# Altium PCB Bottom_Board.PcbDoc
Units mil, origin at the board's own origin, x right, y up, seen from the top; angles counter-clockwise.
Board outline 6000 x 4000 mil, 2 copper layers (Top Layer, Bottom Layer); 170 components, 198 nets, 729 pads, 0 vias.
Unrouted connection lines stored in the file: 469.
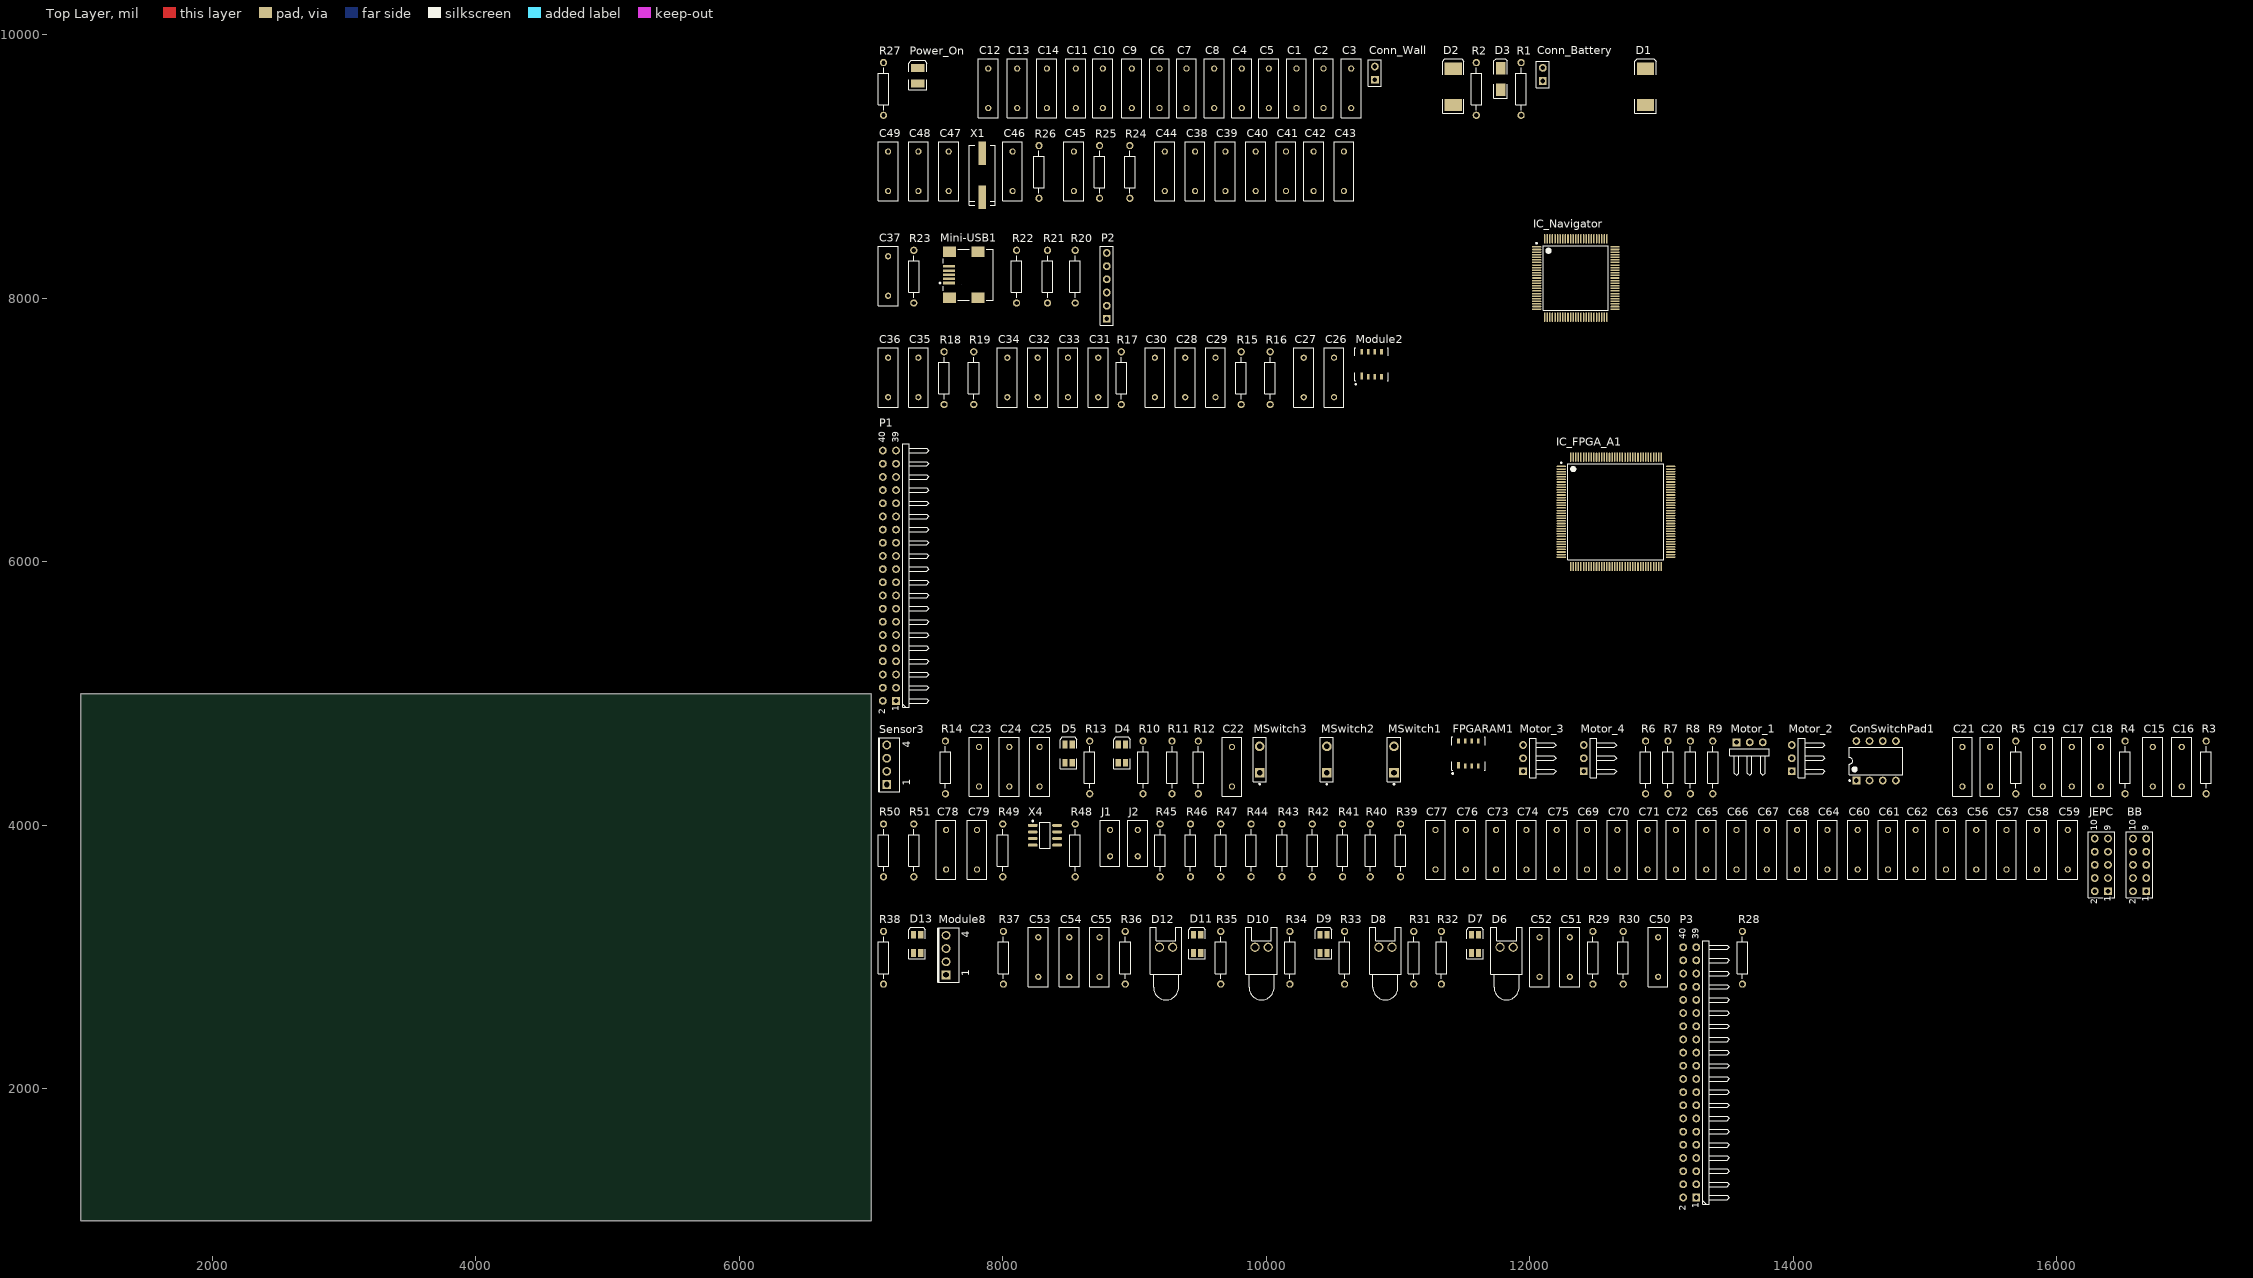
[diagram p0: Top Layer view]
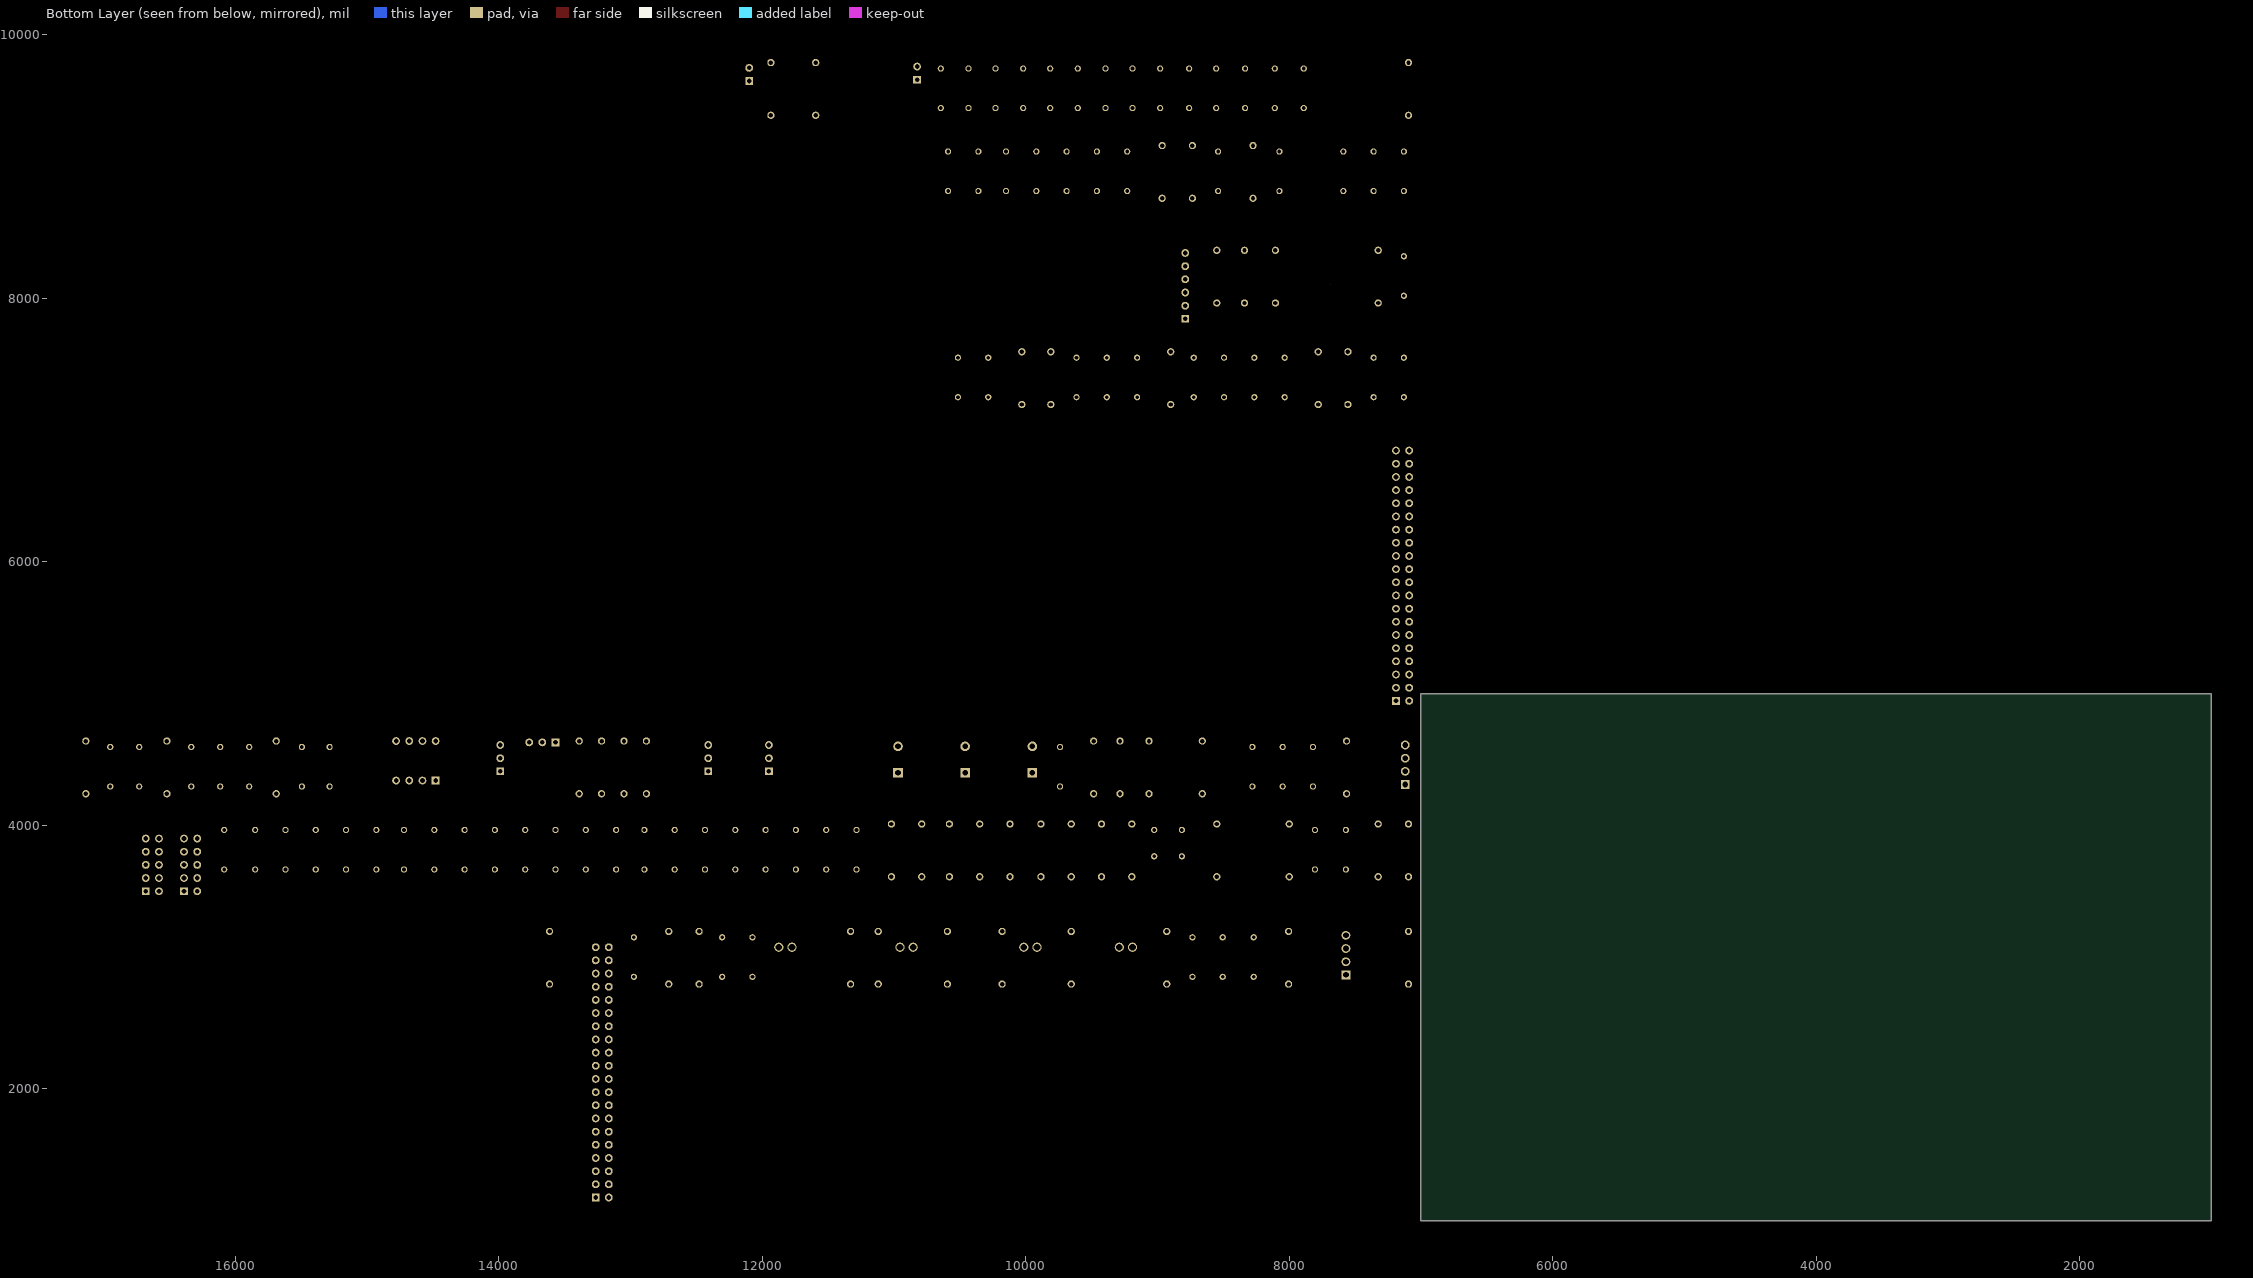
[diagram p1: Bottom Layer view, seen from below]

## Layer stack, top to bottom
Top Layer: signal copper 1.4
Dielectric: dielectric 12.6, FR-4, Dk 4.8
Bottom Layer: signal copper 1.4

## Board outline
1000,1000 7000,1000 7000,5000 1000,5000

## Design rules (kind name [scope] priority, off if disabled: settings)
Clearance [All] p1: gap=10
PolygonConnect [All] p1: connectstyle=Relief reliefconductorwidth=10 reliefentries=4 polygonreliefangle="90 Angle"
RoomDefinition Power [InComponentClass('Power')] p1: confinementstyle=ConfineIn formatcopy=TRUE lockcomponents=FALSE outline 7045,9350 12970,9350 12970,9930 7045,9930
RoomDefinition Navigator_Core [InComponentClass('Navigator_Core')] p2: confinementstyle=ConfineIn formatcopy=TRUE lockcomponents=FALSE outline 7045,8550 11430,8550 11430,9300 7045,9300
RoomDefinition Navigator_Connectors [InComponentClass('Navigator_Connectors')] p3: confinementstyle=ConfineIn formatcopy=TRUE lockcomponents=FALSE outline 7045,7785 8865,7785 8865,8505 7045,8505
RoomDefinition Navigator_Components [InComponentClass('Navigator_Components')] p4: confinementstyle=ConfineIn formatcopy=TRUE lockcomponents=FALSE outline 7045,7155 11090,7155 11090,7735 7045,7735
RoomDefinition FPGA_Core [InComponentClass('FPGA_Core')] p5: confinementstyle=ConfineIn formatcopy=TRUE lockcomponents=FALSE outline 7045,4830 8425,4830 8425,7105 7045,7105
RoomDefinition FPGA_Components [InComponentClass('FPGA_Components')] p6: confinementstyle=ConfineIn formatcopy=TRUE lockcomponents=FALSE outline 7045,4200 17220,4200 17220,4780 7045,4780
RoomDefinition FPGA_Clocks [InComponentClass('FPGA_Clocks')] p7: confinementstyle=ConfineIn formatcopy=TRUE lockcomponents=FALSE outline 7045,3385 16740,3385 16740,4150 7045,4150
RoomDefinition Bottom_Board [InComponentClass('Bottom_Board')] p8: confinementstyle=ConfineIn formatcopy=TRUE lockcomponents=FALSE outline 7045,1060 13760,1060 13760,3335 7045,3335
RoutingVias [All] p1: holewidth=28 width=50 viastyle="Through Hole" minholewidth=28 minwidth=50 maxholewidth=28 maxwidth=50
SilkscreenOverComponentPads [All] p1: minsilkscreentomaskgap=10
SolderMaskExpansion [All] p1: expansion=4
Width [All] p1: maxlimit=10 minlimit=10 preferedwidth=10
27 further rules are at their usual default settings.

## Classes and differential pairs
component class Power: C1 C2 C3 C4 C5 C6 C7 C8 C9 C10 C11 C12 C13 C14 Conn_Battery Conn_Wall D1 D2 D3 Power_On R1 R2 R27 REG1 REG2 REG3 REG4
component class Navigator_Core: C38 C39 C40 C41 C42 C43 C44 C45 C46 C47 C48 C49 IC_Navigator R24 R25 R26 S1 X1 X2
component class Navigator_Connectors: C37 Mini-USB1 P2 R20 R21 R22 R23
component class Navigator_Components: C26 C27 C28 C29 C30 C31 C32 C33 C34 C35 C36 Module1 Module2 Module3 Module4 Module5 Module6 Module7 R15 R16 R17 R18 R19
component class FPGA_Core: IC_FPGA_A1 P1
component class FPGA_Components: C15 C16 C17 C18 C19 C20 C21 C22 C23 C24 C25 ConSwitchPad1 D4 D5 FPGARAM1 Motor_1 Motor_2 Motor_3 Motor_4 MSwitch1 MSwitch2 MSwitch3 R3 R4 R5 R6 R7 R8 R9 R10 R11 R12 R13 R14 Sensor1 Sensor2 Sensor3
component class FPGA_Clocks: BB C56 C57 C58 C59 C60 C61 C62 C63 C64 C65 C66 C67 C68 C69 C70 C71 C72 C73 C74 C75 C76 C77 C78 C79 FPGACONFIGRAM J1 J2 JEPC R39 R40 R41 R42 R43 R44 R45 R46 R47 R48 R49 R50 R51 X3 X4
component class Bottom_Board: C50 C51 C52 C53 C54 C55 CameraModule D6 D7 D8 D9 D10 D11 D12 D13 Module8 P3 R28 R29 R30 R31 R32 R33 R34 R35 R36 R37 R38

## Components (designator, comment, footprint, x,y, rotation, side; value= is the part's Value field where it differs from the comment)
BB "Header 5X2" HDR2X5 16680,3500 r90 top
C1 "Cap" RAD-0.3 10230,9595 r90 top
C2 "Cap" RAD-0.3 10435,9595 r90 top
C3 "Cap" RAD-0.3 10645,9595 r90 top
C4 "Cap" RAD-0.3 9815,9595 r90 top
C5 "Cap" RAD-0.3 10020,9595 r90 top
C6 "Cap" RAD-0.3 9190,9595 r90 top
C7 "Cap" RAD-0.3 9395,9595 r90 top
C8 "Cap" RAD-0.3 9605,9595 r90 top
C9 "Cap" RAD-0.3 8980,9595 r90 top
C10 "Cap" RAD-0.3 8760,9595 r90 top
C11 "Cap" RAD-0.3 8555,9595 r90 top
C12 "Cap" RAD-0.3 7890,9595 r90 top
C13 "Cap" RAD-0.3 8110,9595 r90 top
C14 "Cap" RAD-0.3 8335,9595 r90 top
C15 "Cap" RAD-0.3 16730,4445 r90 top
C16 "Cap" RAD-0.3 16950,4445 r90 top
C17 "Cap" RAD-0.3 16115,4445 r90 top
C18 "Cap" RAD-0.3 16335,4445 r90 top
C19 "Cap" RAD-0.3 15895,4445 r90 top
C20 "Cap" RAD-0.3 15495,4445 r90 top
C21 "Cap" RAD-0.3 15285,4445 r90 top
C22 "Cap" RAD-0.3 9740,4445 r90 top
C23 "Cap" RAD-0.3 7820,4445 r90 top
C24 "Cap" RAD-0.3 8050,4445 r90 top
C25 "Cap" RAD-0.3 8280,4445 r90 top
C26 "Cap" RAD-0.3 10515,7400 r90 top
C27 "Cap" RAD-0.3 10285,7400 r90 top
C28 "Cap" RAD-0.3 9385,7400 r90 top
C29 "Cap" RAD-0.3 9615,7400 r90 top
C30 "Cap" RAD-0.3 9155,7400 r90 top
C31 "Cap" RAD-0.3 8725,7400 r90 top
C32 "Cap" RAD-0.3 8265,7400 r90 top
C33 "Cap" RAD-0.3 8495,7400 r90 top
C34 "Cap" RAD-0.3 8035,7400 r90 top
C35 "Cap" RAD-0.3 7360,7400 r90 top
C36 "Cap" RAD-0.3 7130,7400 r90 top
C37 "Cap" RAD-0.3 7130,8170 r90 top
C38 "Cap" RAD-0.3 9460,8965 r90 top
C39 "Cap" RAD-0.3 9690,8965 r90 top
C40 "Cap" RAD-0.3 9920,8965 r90 top
C41 "Cap" RAD-0.3 10150,8965 r90 top
C42 "Cap" RAD-0.3 10360,8965 r90 top
C43 "Cap" RAD-0.3 10590,8965 r90 top
C44 "6V 1-Ohm Tantalum" RAD-0.3 9230,8965 r90 top
C45 "Cap" RAD-0.3 8540,8965 r90 top
C46 "Cap" RAD-0.3 8075,8965 r90 top
C47 "Cap" RAD-0.3 7590,8965 r90 top
C48 "Cap" RAD-0.3 7360,8965 r90 top
C49 "Cap" RAD-0.3 7130,8965 r90 top
C50 "Cap" RAD-0.3 12975,3000 r90 top
C51 "Cap" RAD-0.3 12305,3000 r90 top
C52 "Cap" RAD-0.3 12075,3000 r90 top
C53 "Cap" RAD-0.3 8270,3000 r90 top
C54 "Cap" RAD-0.3 8505,3000 r90 top
C55 "Cap" RAD-0.3 8735,3000 r90 top
C56 "Cap" RAD-0.3 15390,3815 r90 top
C57 "Cap" RAD-0.3 15620,3815 r90 top
C58 "Cap" RAD-0.3 15850,3815 r90 top
C59 "Cap" RAD-0.3 16085,3815 r90 top
C60 "Cap" RAD-0.3 14490,3815 r90 top
C61 "Cap" RAD-0.3 14720,3815 r90 top
C62 "Cap" RAD-0.3 14930,3815 r90 top
C63 "Cap" RAD-0.3 15160,3815 r90 top
C64 "Cap" RAD-0.3 14260,3815 r90 top
C65 "Cap" RAD-0.3 13340,3815 r90 top
C66 "Cap" RAD-0.3 13570,3815 r90 top
C67 "Cap" RAD-0.3 13800,3815 r90 top
C68 "Cap" RAD-0.3 14030,3815 r90 top
C69 "Cap" RAD-0.3 12435,3815 r90 top
C70 "Cap" RAD-0.3 12665,3815 r90 top
C71 "Cap" RAD-0.3 12895,3815 r90 top
C72 "Cap" RAD-0.3 13110,3815 r90 top
C73 "Cap" RAD-0.3 11745,3815 r90 top
C74 "Cap" RAD-0.3 11975,3815 r90 top
C75 "Cap" RAD-0.3 12205,3815 r90 top
C76 "Cap" RAD-0.3 11515,3815 r90 top
C77 "Cap" RAD-0.3 11285,3815 r90 top
C78 "Cap" RAD-0.3 7570,3815 r90 top
C79 "Cap" RAD-0.3 7805,3815 r90 top
Conn_Battery "Header 2" HDR1X2 12100,9650 r90 top
Conn_Wall "Header 2" HDR1X2 10825,9660 r90 top
ConSwitchPad1 "SW-DIP4" DIP-8 14630,4490 r90 top
D1 "MBRS540T3G" SMC 12880,9605 r90 top
D2 "MBRS540T3G" SMC 11420,9605 r90 top
D3 "1SMAS913BT3G" SMA 11780,9665 r90 top
D4 "HSMF-C157" 3.2X2.7X1.1 8905,4545 r90 top
D5 "HSMF-C157" 3.2X2.7X1.1 8500,4545 r90 top
D6 "LED0" LED-0 11825,3075 r0 top
D7 "HSMF-C157" 3.2X2.7X1.1 11585,3100 r90 top
D8 "LED0" LED-0 10905,3075 r0 top
D9 "HSMF-C157" 3.2X2.7X1.1 10435,3100 r90 top
D10 "LED0" LED-0 9965,3075 r0 top
D11 "HSMF-C157" 3.2X2.7X1.1 9475,3100 r90 top
D12 "LED0" LED-0 9240,3075 r0 top
D13 "HSMF-C157" 3.2X2.7X1.1 7350,3100 r90 top
FPGARAM1 "S25FL128P" 8CN4 11535,4545 r90 top
IC_FPGA_A1 "EP2C8T144C8N" TQFP144_N 12655,6380 r0 top
IC_Navigator "PIC32MX795F512L-80I/PT" ST-100_N 12350,8155 r0 top
J1 "Jumper" RAD-0.2 8815,3865 r90 top
J2 "Jumper" RAD-0.2 9025,3865 r90 top
JEPC "Header 5X2" HDR2X5 16390,3500 r90 top
Mini-USB1 "440247-2" 440247 7900,8180 r0 top
Module2 "S25FL128P" 8CN4 10800,7500 r90 top
Module8 "HC-SR04 Ultrasonic Module" P04A 7570,3015 r90 top
Motor_1 "Header 3H" HDR1X3H 13570,4630 r0 top
Motor_2 "Header 3H" HDR1X3H 13990,4410 r90 top
Motor_3 "Header 3H" HDR1X3H 11950,4410 r90 top
Motor_4 "Header 3H" HDR1X3H 12410,4410 r90 top
MSwitch1 "SW-SPST" SPST-2 10970,4500 r90 top
MSwitch2 "SW-SPST" SPST-2 10460,4500 r90 top
MSwitch3 "SW-SPST" SPST-2 9950,4500 r90 top
P1 "Header 20X2H" HDR2X20H 7190,4945 r90 top
P2 "Header 6" HDR1X6 8790,7845 r90 top
P3 "Header 20X2H" HDR2X20H 13265,1175 r90 top
Power_On "LED3" 3.5X2.8X1.9 7355,9690 r90 top
R1 "Res2" AXIAL-0.4 11935,9590 r90 top
R2 "Res2" AXIAL-0.4 11595,9590 r90 top
R3 "Res2" AXIAL-0.4 17135,4440 r90 top
R4 "Res2" AXIAL-0.4 16520,4440 r90 top
R5 "Res2" AXIAL-0.4 15690,4440 r90 top
R6 "Res2" AXIAL-0.4 12880,4440 r90 top
R7 "Res2" AXIAL-0.4 13050,4440 r90 top
R8 "Res2" AXIAL-0.4 13220,4440 r90 top
R9 "Res2" AXIAL-0.4 13390,4440 r90 top
R10 "Res2" AXIAL-0.4 9065,4440 r90 top
R11 "Res2" AXIAL-0.4 9285,4440 r90 top
R12 "Res2" AXIAL-0.4 9485,4440 r90 top
R13 "Res2" AXIAL-0.4 8660,4440 r90 top
R14 "Res2" AXIAL-0.4 7565,4440 r90 top
R15 "Res2" AXIAL-0.4 9810,7395 r90 top
R16 "Res2" AXIAL-0.4 10030,7395 r90 top
R17 "Res2" AXIAL-0.4 8900,7395 r90 top
R18 "Res2" AXIAL-0.4 7555,7395 r90 top
R19 "Res2" AXIAL-0.4 7780,7395 r90 top
R20 "Res2" AXIAL-0.4 8550,8165 r90 top
R21 "Res2" AXIAL-0.4 8340,8165 r90 top
R22 "Res2" AXIAL-0.4 8105,8165 r90 top
R23 "Res2" AXIAL-0.4 7325,8165 r90 top
R24 "Res2" AXIAL-0.4 8965,8960 r90 top
R25 "Res2" AXIAL-0.4 8735,8960 r90 top
R26 "Res2" AXIAL-0.4 8275,8960 r90 top
R27 "Res2" AXIAL-0.4 7095,9590 r90 top
R28 "Res2" AXIAL-0.4 13615,2995 r90 top
R29 "Res2" AXIAL-0.4 12480,2995 r90 top
R30 "Res2" AXIAL-0.4 12710,2995 r90 top
R31 "Res2" AXIAL-0.4 11120,2995 r90 top
R32 "Res2" AXIAL-0.4 11330,2995 r90 top
R33 "Res2" AXIAL-0.4 10595,2995 r90 top
R34 "Res2" AXIAL-0.4 10180,2995 r90 top
R35 "Res2" AXIAL-0.4 9655,2995 r90 top
R36 "Res2" AXIAL-0.4 8930,2995 r90 top
R37 "Res2" AXIAL-0.4 8005,2995 r90 top
R38 "Res2" AXIAL-0.4 7095,2995 r90 top
R39 "Res2" AXIAL-0.4 11020,3810 r90 top
R40 "Res2" AXIAL-0.4 10790,3810 r90 top
R41 "Res2" AXIAL-0.4 10580,3810 r90 top
R42 "Res2" AXIAL-0.4 10350,3810 r90 top
R43 "Res2" AXIAL-0.4 10120,3810 r90 top
R44 "Res2" AXIAL-0.4 9885,3810 r90 top
R45 "Res2" AXIAL-0.4 9195,3810 r90 top
R46 "Res2" AXIAL-0.4 9425,3810 r90 top
R47 "Res2" AXIAL-0.4 9655,3810 r90 top
R48 "Res2" AXIAL-0.4 8550,3810 r90 top
R49 "Res2" AXIAL-0.4 8000,3810 r90 top
R50 "Res2" AXIAL-0.4 7095,3810 r90 top
R51 "Res2" AXIAL-0.4 7325,3810 r90 top
Sensor3 "HC-SR04 Ultrasonic Module" P04A 7120,4460 r90 top
X1 "XT9M20ANA8M" BCY-F2/Z13 7845,8935 r90 top
X4 "DS1085" SO8_L 8320,3925 r0 top

## Footprints (in the part's own frame and the unit in brackets; to place one, negate y for a bottom-side part, rotate by r counter-clockwise, add the part's x,y. Pads: shape width x height; smd on the part's side, far side on the other; paste and mask are expansions set on the pad)
3.2X2.7X1.1 [mm] "SM LED, Bi-Colour; 4 Flat Leads; Body 3.2 x 2.7 x 1.1 mm (LxWxH)"
  rect 1.5x1 smd: 1(-1.75,0.7) 2(1.75,0.7) 3(-1.75,-0.7) 4(1.75,-0.7)
  silkscreen extent -2.9,-1.6 3.2,1.6
3.5X2.8X1.9 [mm] "SM LED; 2 C-Bend Leads; Body 3.5 x 2.8 x 1.9 mm, inc leads (LxWxH typ)"
  rect 1.5x2.6 smd: 1(-1.5,0) 2(1.5,0)
  silkscreen extent -2.65,-1.7 2.95,1.7
8CN4 [mm] "SON, 8-Leads, Body 6x6 mm, Pitch 1.27mm"
  rect 1.3x0.5 smd: 1(-2.25,1.905)
  rect 1x0.5 smd: 2(-2.4,0.635) 3(-2.4,-0.635) 4(-2.4,-1.905) 5(2.4,-1.905) 6(2.4,-0.635) 7(2.4,0.635) 8(2.4,1.905)
  silkscreen extent -3.97,-3.2 3.2,3.2, body extent -3.05,-3.05 3.05,3.05, height 1.19
440247 [mm] "Connector; USB2.0, Type B, SM; 5 Position; Right Angle"
  rect 2.3x0.5 smd: 1(-7.85,-1.6) 2(-7.85,-0.8) 3(-7.85,0) 4(-7.85,0.8) 5(-7.85,1.6)
  rect 2.5x2 smd: 6(-7.75,4.45) 7(-2.25,4.45) 8(-7.75,-4.45) 9(-2.25,-4.45)
  round 0.6 hole 0.9 unplated: MH1(-5.25,2.2) MH2(-5.25,-2.2)
  silkscreen extent -9.67,-4.95 0.7,4.95
AXIAL-0.4 [mm] "Axial Device, Thru-Hole; 2 Leads; 0.4 in Pin Spacing"
  round 1.4 hole 0.85: 1(-5.08,0) 2(5.08,0)
  silkscreen extent -4.06,-1.02 4.06,1.02
BCY-F2/Z13 [mm] "Quartz Crystal, SM; 2 Leads; Body 11.4 x 4.8 x 5 mm (LxWxH)"
  rect 4.5x1.5 smd: 1(-4.25,0) 2(4.25,0)
  silkscreen extent -5.75,-2.5 5.75,2.5
DIP-8 [mm] "DIP; 8 Leads; Row Spacing 7.62 mm; Pitch 2.54 mm"
  rect 1.5x1.5 hole 0.9: 1(-3.81,3.81)
  round 1.5 hole 0.9: 2(-3.81,1.27) 3(-3.81,-1.27) 4(-3.81,-3.81) 5(3.81,-3.81) 6(3.81,-1.27) 7(3.81,1.27) 8(3.81,3.81)
  silkscreen extent -3.93,-5.15 2.65,5.23, body extent -3.6,-5.15 3.6,5.15, height 5.08
HDR1X2 [mm] "Connector; Header; 2 Position"
  rect 1.5x1.5 hole 0.9: 1(0,0)
  round 1.5 hole 0.9: 2(2.54,0)
  silkscreen extent -1.27,-1.27 3.81,1.27
HDR1X3H [mm] "Connector; Header; 3 Position; Right Angle"
  rect 1.5x1.5 hole 0.9: 1(0,0)
  round 1.5 hole 0.9: 2(2.54,0) 3(5.08,0)
  silkscreen extent -1.27,-6.35 6.35,-1.27
HDR1X6 [mm] "Connector; Header; 6 Position"
  rect 1.5x1.5 hole 0.9: 1(0,0)
  round 1.5 hole 0.9: 2(2.54,0) 3(5.08,0) 4(7.62,0) 5(10.16,0) 6(12.7,0)
  silkscreen extent -1.27,-1.27 13.97,1.27
HDR2X5 [mm] "Connector; Header; 5x2 Position"
  rect 1.5x1.5 hole 0.9: 1(0,0)
  round 1.5 hole 0.9: 2(0,2.54) 3(2.54,0) 4(2.54,2.54) 5(5.08,0) 6(5.08,2.54) 7(7.62,0) 8(7.62,2.54) 9(10.16,0) 10(10.16,2.54)
  silkscreen extent -1.27,-1.27 11.43,3.81
HDR2X20H [mm] "Connector; Header; 20x2 Position; Right Angle"
  rect 1.5x1.5 hole 0.9: 1(0,0)
  round 1.5 hole 0.9: 2(0,2.54) 3(2.54,0) 4(2.54,2.54) 5(5.08,0) 6(5.08,2.54) 7(7.62,0) 8(7.62,2.54) 9(10.16,0) 10(10.16,2.54) 11(12.7,0) 12(12.7,2.54) 13(15.24,0) 14(15.24,2.54) 15(17.78,0) 16(17.78,2.54) 17(20.32,0) 18(20.32,2.54) 19(22.86,0) 20(22.86,2.54) 21(25.4,0) 22(25.4,2.54) 23(27.94,0) 24(27.94,2.54) 25(30.48,0) 26(30.48,2.54) 27(33.02,0) 28(33.02,2.54) 29(35.56,0) 30(35.56,2.54) 31(38.1,0) 32(38.1,2.54) 33(40.64,0) 34(40.64,2.54) 35(43.18,0) 36(43.18,2.54) 37(45.72,0) 38(45.72,2.54) 39(48.26,0) 40(48.26,2.54)
  silkscreen extent -1.27,-6.35 49.53,-1.27
LED-0 [mil] "LED; 2 Leads"
  round 70 hole 50: 1(50,0) 2(-50,0)
  silkscreen extent -120,-400 120,150
P04A [mm] "TO, Thru-Hole, Vertical, Heatsink Mounted; 4 In-Line Leads; Pitch 2.54 mm"
  rect 1.7x1.7 hole 1.1: 1(-3.81,0)
  round 1.7 hole 1.1: 2(-1.27,0) 3(1.27,0) 4(3.81,0)
  silkscreen extent -5.25,-2.5 5.25,1.71
RAD-0.2 [mm] "Radial Cap, Thru-Hole; 2 Leads; 0.2 in Pin Spacing"
  round 1.2 hole 0.7: 1(-2.54,0) 2(2.54,0)
  silkscreen extent -4.44,-1.91 4.44,1.91
RAD-0.3 [mm] "Radial Cap, Thru-Hole; 2 Leads; 0.3 in Pin Spacing"
  round 1.2 hole 0.7: 1(-3.81,0) 2(3.81,0)
  silkscreen extent -5.71,-1.91 5.71,1.91
SMA [mm] "DO-214-AC/SMA; 2 C-Bend Leads; Body 5 x 2.7 mm, inc. leads (LxW)"
  rect 2.4x1.8 smd: 1(-2.05,0) 2(2.05,0)
  silkscreen extent -3.65,-1.3 3.95,1.3
SMC [mm] "DO-214-AB/SMC; 2 C-Bend Leads; Body 7.9 x 5.9 mm, inc. leads (LxW)"
  rect 2.4x3.3 smd: 1(-3.475,0) 2(3.475,0)
  silkscreen extent -5.07,-2.05 5.43,2.05
SO8_L [mm] "SOIC, 8-Leads, Body 4.9x3.9mm, Pitch 1.27mm, IPC High Density"
  oval 1.9x0.6 smd: 1(-2.35,1.905) 2(-2.35,0.635) 3(-2.35,-0.635) 4(-2.35,-1.905) 5(2.35,-1.905) 6(2.35,-0.635) 7(2.35,0.635) 8(2.35,1.905)
  silkscreen extent -2.47,-2.5 1,2.88, body extent -2,-2.5 2,2.5, height 1.75
SPST-2 [mm] "Switch; 2 Leads"
  rect 1.85x1.85 hole 1.1: 1(-2.54,0)
  round 1.85 hole 1.1: 2(2.54,0)
  silkscreen extent -4.89,-1.27 4.28,1.27
ST-100_N [mm] "Thin QFP, 100-Leads, Body 14x14mm, Pitch 0.5mm, IPC Medium Density"
  oval 1.8x0.3 smd: 1(-7.55,6) 2(-7.55,5.5) 3(-7.55,5) 4(-7.55,4.5) 5(-7.55,4) 6(-7.55,3.5) 7(-7.55,3) 8(-7.55,2.5) 9(-7.55,2) 10(-7.55,1.5) 11(-7.55,1) 12(-7.55,0.5) 13(-7.55,0) 14(-7.55,-0.5) 15(-7.55,-1) 16(-7.55,-1.5) 17(-7.55,-2) 18(-7.55,-2.5) 19(-7.55,-3) 20(-7.55,-3.5) 21(-7.55,-4) 22(-7.55,-4.5) 23(-7.55,-5) 24(-7.55,-5.5) 25(-7.55,-6) 51(7.55,-6) 52(7.55,-5.5) 53(7.55,-5) 54(7.55,-4.5) 55(7.55,-4) 56(7.55,-3.5) 57(7.55,-3) 58(7.55,-2.5) 59(7.55,-2) 60(7.55,-1.5) 61(7.55,-1) 62(7.55,-0.5) 63(7.55,0) 64(7.55,0.5) 65(7.55,1) 66(7.55,1.5) 67(7.55,2) 68(7.55,2.5) 69(7.55,3) 70(7.55,3.5) 71(7.55,4) 72(7.55,4.5) 73(7.55,5) 74(7.55,5.5) 75(7.55,6)
  oval 0.3x1.8 smd: 26(-6,-7.55) 27(-5.5,-7.55) 28(-5,-7.55) 29(-4.5,-7.55) 30(-4,-7.55) 31(-3.5,-7.55) 32(-3,-7.55) 33(-2.5,-7.55) 34(-2,-7.55) 35(-1.5,-7.55) 36(-1,-7.55) 37(-0.5,-7.55) 38(0,-7.55) 39(0.5,-7.55) 40(1,-7.55) 41(1.5,-7.55) 42(2,-7.55) 43(2.5,-7.55) 44(3,-7.55) 45(3.5,-7.55) 46(4,-7.55) 47(4.5,-7.55) 48(5,-7.55) 49(5.5,-7.55) 50(6,-7.55) 76(6,7.55) 77(5.5,7.55) 78(5,7.55) 79(4.5,7.55) 80(4,7.55) 81(3.5,7.55) 82(3,7.55) 83(2.5,7.55) 84(2,7.55) 85(1.5,7.55) 86(1,7.55) 87(0.5,7.55) 88(0,7.55) 89(-0.5,7.55) 90(-1,7.55) 91(-1.5,7.55) 92(-2,7.55) 93(-2.5,7.55) 94(-3,7.55) 95(-3.5,7.55) 96(-4,7.55) 97(-4.5,7.55) 98(-5,7.55) 99(-5.5,7.55) 100(-6,7.55)
  silkscreen extent -7.67,-6.25 6.25,6.82, body extent -7,-7 7,7, height 1.6
TQFP144_N [mm] "Thin QFP, 144-Leads, Body 20x20mm, Pitch 0.5mm, IPC Medium Density"
  oval 1.8x0.3 smd: 1(-10.55,8.75) 2(-10.55,8.25) 3(-10.55,7.75) 4(-10.55,7.25) 5(-10.55,6.75) 6(-10.55,6.25) 7(-10.55,5.75) 8(-10.55,5.25) 9(-10.55,4.75) 10(-10.55,4.25) 11(-10.55,3.75) 12(-10.55,3.25) 13(-10.55,2.75) 14(-10.55,2.25) 15(-10.55,1.75) 16(-10.55,1.25) 17(-10.55,0.75) 18(-10.55,0.25) 19(-10.55,-0.25) 20(-10.55,-0.75) 21(-10.55,-1.25) 22(-10.55,-1.75) 23(-10.55,-2.25) 24(-10.55,-2.75) 25(-10.55,-3.25) 26(-10.55,-3.75) 27(-10.55,-4.25) 28(-10.55,-4.75) 29(-10.55,-5.25) 30(-10.55,-5.75) 31(-10.55,-6.25) 32(-10.55,-6.75) 33(-10.55,-7.25) 34(-10.55,-7.75) 35(-10.55,-8.25) 36(-10.55,-8.75) 73(10.55,-8.75) 74(10.55,-8.25) 75(10.55,-7.75) 76(10.55,-7.25) 77(10.55,-6.75) 78(10.55,-6.25) 79(10.55,-5.75) 80(10.55,-5.25) 81(10.55,-4.75) 82(10.55,-4.25) 83(10.55,-3.75) 84(10.55,-3.25) 85(10.55,-2.75) 86(10.55,-2.25) 87(10.55,-1.75) 88(10.55,-1.25) 89(10.55,-0.75) 90(10.55,-0.25) 91(10.55,0.25) 92(10.55,0.75) 93(10.55,1.25) 94(10.55,1.75) 95(10.55,2.25) 96(10.55,2.75) 97(10.55,3.25) 98(10.55,3.75) 99(10.55,4.25) 100(10.55,4.75) 101(10.55,5.25) 102(10.55,5.75) 103(10.55,6.25) 104(10.55,6.75) 105(10.55,7.25) 106(10.55,7.75) 107(10.55,8.25) 108(10.55,8.75)
  oval 0.3x1.8 smd: 37(-8.75,-10.55) 38(-8.25,-10.55) 39(-7.75,-10.55) 40(-7.25,-10.55) 41(-6.75,-10.55) 42(-6.25,-10.55) 43(-5.75,-10.55) 44(-5.25,-10.55) 45(-4.75,-10.55) 46(-4.25,-10.55) 47(-3.75,-10.55) 48(-3.25,-10.55) 49(-2.75,-10.55) 50(-2.25,-10.55) 51(-1.75,-10.55) 52(-1.25,-10.55) 53(-0.75,-10.55) 54(-0.25,-10.55) 55(0.25,-10.55) 56(0.75,-10.55) 57(1.25,-10.55) 58(1.75,-10.55) 59(2.25,-10.55) 60(2.75,-10.55) 61(3.25,-10.55) 62(3.75,-10.55) 63(4.25,-10.55) 64(4.75,-10.55) 65(5.25,-10.55) 66(5.75,-10.55) 67(6.25,-10.55) 68(6.75,-10.55) 69(7.25,-10.55) 70(7.75,-10.55) 71(8.25,-10.55) 72(8.75,-10.55) 109(8.75,10.55) 110(8.25,10.55) 111(7.75,10.55) 112(7.25,10.55) 113(6.75,10.55) 114(6.25,10.55) 115(5.75,10.55) 116(5.25,10.55) 117(4.75,10.55) 118(4.25,10.55) 119(3.75,10.55) 120(3.25,10.55) 121(2.75,10.55) 122(2.25,10.55) 123(1.75,10.55) 124(1.25,10.55) 125(0.75,10.55) 126(0.25,10.55) 127(-0.25,10.55) 128(-0.75,10.55) 129(-1.25,10.55) 130(-1.75,10.55) 131(-2.25,10.55) 132(-2.75,10.55) 133(-3.25,10.55) 134(-3.75,10.55) 135(-4.25,10.55) 136(-4.75,10.55) 137(-5.25,10.55) 138(-5.75,10.55) 139(-6.25,10.55) 140(-6.75,10.55) 141(-7.25,10.55) 142(-7.75,10.55) 143(-8.25,10.55) 144(-8.75,10.55)
  silkscreen extent -10.67,-9.25 9.25,9.57, body extent -10,-10 10,10, height 1.6

## Part data
BB JEPC: "Header, 5-Pin, Dual row"
C1 C2 C3 C4 C5 C6 C7 C8 C9 C10 C11 C12 C13 C14 C15 C16 C17 C18 C19 C20 C21 C22 C23 C24 C25 C26 C27 C28 C29 C30 C31 C32 C33 C34 C35 C36 C37 C38 C39 C40 C41 C42 C43 C45 C46 C47 C48 C49 C50 C51 C52 C53 C54 C55 C56 C57 C58 C59 C60 C61 C62 C63 C64 C65 C66 C67 C68 C69 C70 C71 C72 C73 C74 C75 C76 C77 C78 C79: "Capacitor"
C44: library part Cap, "Capacitor"
Conn_Battery Conn_Wall: "Header, 2-Pin"
ConSwitchPad1: "DIP Switch"
D1 D2: "40V 5A Scottky Diode"
D3: "3.3V 1.5W Zener Diode"
D4 D5 D7 D9 D11 D13: "Surface Mount Chip LED (Orange/Green)"
D6 D8 D10 D12: "Typical INFRARED GaAs LED"
FPGARAM1 Module2: "128MB 104-MHz SPI Flash Memory"
IC_FPGA_A1: "Cyclone II Family, 1.2V FPGA, 85 I/O Pins, 2 PLLs, 144-Pin TQFP, Speed Grade 8, Commercial Grade, Pb-Free"
IC_Navigator: "High Performance 80 MHz MIPS-Based 32-Bit Flash Microcontroller with USB, CAN and Ethernet, 512KB Program Memory, 100-pin TQFP, Industrial Temperature"
J1 J2: "Jumper Wire"
Mini-USB1: "USB 2.0, Right Angle, SMT, B Type, Receptacle, 5 Position, Black"
Motor_1 Motor_2 Motor_3 Motor_4: "Header, 3-Pin, Right Angle"
MSwitch1 MSwitch2 MSwitch3: "Single-Pole, Single-Throw Switch"
P1 P3: "Header, 20-Pin, Dual row, Right Angle"
P2: "Header, 6-Pin"
Power_On: "Typical BLUE SiC LED"
R1 R2 R3 R4 R5 R6 R7 R8 R9 R10 R11 R12 R13 R14 R15 R16 R17 R18 R19 R20 R21 R22 R23 R24 R25 R26 R27 R28 R29 R30 R31 R32 R33 R34 R35 R36 R37 R38 R39 R40 R41 R42 R43 R44 R45 R46 R47 R48 R49 R50 R51: "Resistor"
X1: "8MHz SMD Crystal"
X4: "EconOscillator Frequency Synthesizer"

## Nets (pads, with @x,y where several pads share a name; then routed paths per layer and width w, separated by ;. In a path a pad name is that pad's centre, name@x,y a point inside that pad or via, vN(x,y) a via of type N, cw(c..) or ccw(c..) an arc to the next point about the centre after c; other vN are vias at no path point)
25MHZ_CLOCK: IC_FPGA_A1.17
+1.2V: C11.2 C56.1 C60.1 C65.1 C69.1 C73.1 C76.1 C77.1 IC_FPGA_A1.26 IC_FPGA_A1.35 IC_FPGA_A1.37 IC_FPGA_A1.50 IC_FPGA_A1.62 IC_FPGA_A1.81 IC_FPGA_A1.107 IC_FPGA_A1.109 IC_FPGA_A1.124 IC_FPGA_A1.131 P1.2
+1.5V: C9.2 P1.4
+2.8V: C8.2 C57.1 C61.1 C66.1 C70.1 IC_FPGA_A1.77 IC_FPGA_A1.95 IC_FPGA_A1.102 P1.6
+5.0V: C4.2 C7.2 C10.2 C14.1 C23.2 C24.2 C25.2 C78.2 C79.2 J1.2 J2.2 P1.10 R50.1 R51.1 X4.2
/+1.2V: P3.2
/+1.5V: C50.1 P3.4
/+2.8V: C51.1 C52.1 P3.6 R29.1 R30.2
/+3.3V: P3.8
/+5.0V: C53.2 C54.2 C55.2 P3.10
/BLED_BLUE1: D6.1 P3.34
/BLED_BLUE2: D8.1 P3.36
/BLED_BLUE3: D10.1 P3.38
/BLED_BLUE4: D12.1 P3.40
/BLED_ORANGE1: D7.1 D7.3 P3.26
/BLED_ORANGE2: D9.1 D9.3 P3.28
/BLED_ORANGE3: D11.1 D11.3 P3.30
/BLED_ORANGE4: D13.1 D13.3 P3.32
/CAMERA_DCLK: P3.23
/CAMERA_DOUT0: P3.25
/CAMERA_DOUT1: P3.27
/CAMERA_DOUT2: P3.29
/CAMERA_DOUT3: P3.31
/CAMERA_DOUT4: P3.33
/CAMERA_DOUT5: P3.35
/CAMERA_DOUT6: P3.37
/CAMERA_DOUT7: P3.39
/CAMERA_EXTCLK: P3.17
/CAMERA_HD: P3.19
/CAMERA_RESET: P3.15 R28.2
/CAMERA_SCL: P3.11 R30.1
/CAMERA_SDA: P3.13 R29.2
/CAMERA_VD: P3.21
/GND: C50.2 C51.2 C52.2 C53.1 C54.1 C55.1 Module8.3 P3.1 P3.3 P3.5 P3.7 P3.9 R28.1 R31.2 R32.2 R33.2 R34.2 R35.2 R36.2 R37.2 R38.2
/ULTRASONIC_EDGE: Module8.2 P3.16
/ULTRASONIC_TRIGGER: Module8.1 P3.14
ACCEL_INT1: IC_FPGA_A1.55
ACCEL_INT2: IC_FPGA_A1.57
ACCEL_SA0: IC_FPGA_A1.53
ACCEL_SCL: IC_FPGA_A1.43 R3.1
ACCEL_SDA: IC_FPGA_A1.44 R4.2
ASDO: IC_FPGA_A1.1 JEPC.9
BAROMETER_/CS: IC_Navigator.76
BAROMETER_/SHDN: IC_Navigator.38
BAROMETER_DIN: IC_Navigator.72 Module2.4
BAROMETER_DOUT: IC_Navigator.9 Module2.1
BAROMETER_SCLK: IC_Navigator.70 Module2.5
BLED_BLUE1: IC_FPGA_A1.69 P1.34
BLED_BLUE2: IC_FPGA_A1.70 P1.36
BLED_BLUE3: IC_FPGA_A1.71 P1.38
BLED_BLUE4: IC_FPGA_A1.72 P1.40
BLED_ORANGE1: IC_FPGA_A1.63 P1.26
BLED_ORANGE2: IC_FPGA_A1.64 P1.28
BLED_ORANGE3: IC_FPGA_A1.65 P1.30
BLED_ORANGE4: IC_FPGA_A1.67 P1.32
BULTRASONIC_EDGE: IC_FPGA_A1.60 P1.16
BULTRASONIC_TRIGGER: IC_FPGA_A1.59 P1.14
CAMERA_DCLK: IC_FPGA_A1.92 P1.23
CAMERA_DOUT0: IC_FPGA_A1.93 P1.25
CAMERA_DOUT1: IC_FPGA_A1.94 P1.27
CAMERA_DOUT2: IC_FPGA_A1.96 P1.29
CAMERA_DOUT3: IC_FPGA_A1.97 P1.31
CAMERA_DOUT4: IC_FPGA_A1.99 P1.33
CAMERA_DOUT5: IC_FPGA_A1.100 P1.35
CAMERA_DOUT6: IC_FPGA_A1.101 P1.37
CAMERA_DOUT7: IC_FPGA_A1.103 P1.39
CAMERA_EXTCLK: IC_FPGA_A1.79 P1.17
CAMERA_HD: IC_FPGA_A1.86 P1.19
CAMERA_RESET: IC_FPGA_A1.75 P1.15
CAMERA_SCL: IC_FPGA_A1.73 P1.11
CAMERA_SDA: IC_FPGA_A1.74 P1.13
CAMERA_VD: IC_FPGA_A1.87 P1.21
CLOCK_SYNTH_0: IC_FPGA_A1.21 X4.1
CLOCK_SYNTH_1: IC_FPGA_A1.91
CONF_DONE: IC_FPGA_A1.83 JEPC.3 R39.1
CONFSWITCH_1: ConSwitchPad1.8 IC_FPGA_A1.3 R9.1
CONFSWITCH_2: ConSwitchPad1.7 IC_FPGA_A1.4 R8.1
CONFSWITCH_3: ConSwitchPad1.6 IC_FPGA_A1.7 R7.1
CONFSWITCH_4: ConSwitchPad1.5 IC_FPGA_A1.8 R6.1
CONFSWITCH_5: IC_FPGA_A1.9 MSwitch1.2 R12.1
CONFSWITCH_6: IC_FPGA_A1.24 MSwitch2.2 R11.1
CONFSWITCH_7: IC_FPGA_A1.25 MSwitch3.2 R10.1
DATAO: IC_FPGA_A1.14 JEPC.7
DCLK: IC_FPGA_A1.15 JEPC.1
DS1085_SCL: IC_Navigator.66 R18.1 R50.2 X4.7
DS1085_SDA: IC_Navigator.67 R19.1 R51.2 X4.6
FPGA_A-/D: IC_FPGA_A1.122 IC_Navigator.18
FPGA_D0: IC_FPGA_A1.112 IC_Navigator.93
FPGA_D1: IC_FPGA_A1.113 IC_Navigator.94
FPGA_D2: IC_FPGA_A1.114 IC_Navigator.98
FPGA_D3: IC_FPGA_A1.115 IC_Navigator.99
FPGA_D4: IC_FPGA_A1.118 IC_Navigator.100
FPGA_D5: IC_FPGA_A1.119 IC_Navigator.3
FPGA_D6: IC_FPGA_A1.120 IC_Navigator.4
FPGA_D7: IC_FPGA_A1.121 IC_Navigator.5
FPGA_OK-IN: IC_FPGA_A1.129 IC_Navigator.88
FPGA_OK-OUT: IC_FPGA_A1.126 IC_Navigator.87
FPGA_R-/W: IC_FPGA_A1.125 IC_Navigator.19
FPGA_SPI_/GYROCS: IC_FPGA_A1.45
FPGA_SPI_/SRAMCS: IC_FPGA_A1.51
FPGA_SPI_CLOCK: FPGARAM1.5 IC_FPGA_A1.40
FPGA_SPI_DATAIN: FPGARAM1.4 IC_FPGA_A1.41
FPGA_SPI_DATAOUT: FPGARAM1.1 IC_FPGA_A1.42
FPGASRAM_/WP: FPGARAM1.2 IC_FPGA_A1.52
FULTRASONIC_EDGE: IC_FPGA_A1.32 Sensor3.2
FULTRASONIC_TRIGGER: IC_FPGA_A1.31 Sensor3.1
GND: BB.2 BB.10 C1.1 C2.1 C3.1 C4.1 C5.1 C6.2 C7.1 C8.1 C9.1 C10.1 C11.1 C12.1 C13.1 C14.2 C15.1 C17.2 C18.2 C19.1 C21.2 C22.2 C23.1 C24.1 C25.1 C26.2 C27.2 C28.1 C29.1 C30.1 C31.2 C32.1 C33.1 C34.1 C35.2 C37.1 C38.2 C39.2 C40.2 C41.2 C42.2 C43.2 C44.1 C45.1 C46.1 C47.1 C48.1 C49.1 C56.2 C57.2 C58.2 C59.2 C60.2 C61.2 C62.2 C63.2 C64.2 C65.2 C66.2 C67.2 C68.2 C69.2 C70.2 C71.2 C72.2 C73.2 C74.2 C75.2 C76.2 C77.2 C78.1 C79.1 Conn_Battery.1 Conn_Wall.1 FPGARAM1.3 IC_FPGA_A1.6 IC_FPGA_A1.19 IC_FPGA_A1.27 IC_FPGA_A1.33 IC_FPGA_A1.34 IC_FPGA_A1.36 IC_FPGA_A1.38 IC_FPGA_A1.39 IC_FPGA_A1.49 IC_FPGA_A1.56 IC_FPGA_A1.61 IC_FPGA_A1.68 IC_FPGA_A1.78 IC_FPGA_A1.80 IC_FPGA_A1.98 IC_FPGA_A1.105 IC_FPGA_A1.106 IC_FPGA_A1.108 IC_FPGA_A1.110 IC_FPGA_A1.111 IC_FPGA_A1.117 IC_FPGA_A1.123 IC_FPGA_A1.128 IC_FPGA_A1.130 IC_FPGA_A1.140 IC_Navigator.15 IC_Navigator.31 IC_Navigator.36 IC_Navigator.45 IC_Navigator.65 IC_Navigator.75 JEPC.2 JEPC.10 Mini-USB1.4 Mini-USB1.5 Mini-USB1.6 Mini-USB1.7 Mini-USB1.8 Mini-USB1.9 Module2.3 Motor_1.3 Motor_2.3 Motor_3.3 Motor_4.3 P1.1 P1.3 P1.5 P1.7 P1.9 P2.3 Power_On.2 R2.1 R5.2 R6.2 R7.2 R8.2 R9.2 R10.2 R11.2 R12.2 R13.2 R14.2 R22.1 R44.1 R45.2 R46.2 R47.1 R48.1 R49.1 Sensor3.3 X4.3
GPS_PPS: IC_Navigator.59
GPS_RXA: IC_Navigator.39
GPS_RXB: IC_Navigator.50
GPS_TXA: IC_Navigator.40
GPS_TXB: IC_Navigator.49
GPS_XRST: IC_Navigator.61 R15.2
GPS_XSTBY: IC_Navigator.60 R16.2
GYRO_DRDY: IC_FPGA_A1.47
GYRO_INT1: IC_FPGA_A1.48
HUMIDITY_I/O: IC_Navigator.29 R17.1
ICSP_MCLR: P2.1 R26.2
ICSP_PGC: IC_Navigator.24 R21.2
ICSP_PGD: IC_Navigator.25 R20.2
MAGNET_DRDY: IC_Navigator.17
MCLR: IC_Navigator.13 R25.1 R26.1
MOTOR_W1: IC_FPGA_A1.141 Motor_1.1
MOTOR_W2: IC_FPGA_A1.142 Motor_2.1
MOTOR_W3: IC_FPGA_A1.143 Motor_3.1
MOTOR_W4: IC_FPGA_A1.144 Motor_4.1
MSEL0: IC_FPGA_A1.85 R44.2
MSEL1: IC_FPGA_A1.84 R47.2
NCE: IC_FPGA_A1.16 JEPC.6 R48.2
NCONFIG: IC_FPGA_A1.20 JEPC.5 R40.1
NCSO: IC_FPGA_A1.2 JEPC.8
NetC5_2: C5.2
NetC16_1: C16.1
NetC19_2: C19.2
NetC20_1: C20.1 C21.1
NetC20_2: C20.2 R5.1
NetC30_2: C30.2
NetC34_2: C34.2
NetC36_1: C36.1
NetC36_2: C36.2
NetC44_2: C44.2 IC_Navigator.85
NetC45_2: C45.2 IC_Navigator.30 R24.1
NetConn_Battery_2: Conn_Battery.2
NetConn_Wall_2: Conn_Wall.2
NetD4_2: D4.2 D4.4 R13.1
NetD5_2: D5.2 D5.4 R14.1
NetD6_2: D6.2 R32.1
NetD7_2: D7.2 D7.4 R31.1
NetD8_2: D8.2 R33.1
NetD9_2: D9.2 D9.4 R34.1
NetD10_2: D10.2 R35.1
NetD11_2: D11.2 D11.4 R36.1
NetD12_2: D12.2 R37.1
NetD13_2: D13.2 D13.4 R38.1
NetIC_Navigator_2: IC_Navigator.2 IC_Navigator.16 IC_Navigator.46 IC_Navigator.62 IC_Navigator.86
NetJ1_1: J1.1 R45.1 X4.4
NetJ2_1: J2.1 R46.1 X4.5
NetMini-USB1_1: Mini-USB1.1 R22.2 R23.1
NetP2_4: P2.4 R20.1
NetP2_5: P2.5 R21.1
NetPower_On_1: Power_On.1 R27.1
NSTATUS: IC_FPGA_A1.82 R41.1
OSC1: C46.2 IC_Navigator.63 X1.1
OSC2: C47.2 IC_Navigator.64
P28: D4.1 D4.3 IC_FPGA_A1.28
P30: D5.1 D5.3 IC_FPGA_A1.30
P58: IC_FPGA_A1.58
P104: IC_FPGA_A1.104
P132: IC_FPGA_A1.132 IC_Navigator.10
P133: IC_FPGA_A1.133 IC_Navigator.12
P134: IC_FPGA_A1.134 IC_Navigator.11
P135: IC_FPGA_A1.135 IC_Navigator.81
P136: IC_FPGA_A1.136
P137: IC_FPGA_A1.137
P139: IC_FPGA_A1.139
PIC_SRAM_/CS: IC_Navigator.78
PIC_SRAM_/WP: IC_Navigator.58 Module2.2
PIC_UART1_/CTS: IC_Navigator.47
PIC_UART1_/RTS: IC_Navigator.48
PIC_UART1_RX: IC_Navigator.52
PIC_UART1_TX: IC_Navigator.53
SOSCI: C48.2 IC_Navigator.73
SOSCO: C49.2 IC_Navigator.74
SYS: C1.2 C2.2 C3.2 C6.1 C12.2 D1.1 D2.1 R1.2
SYSPOWMONITOR: D3.1 IC_Navigator.23 R1.1 R2.2
TCK: BB.1 IC_FPGA_A1.12 R49.2
TDI: BB.9 IC_FPGA_A1.13 R43.1
TDO: BB.3 IC_FPGA_A1.10
TMS: BB.5 IC_FPGA_A1.11 R42.1
USB_D+: IC_Navigator.57 Mini-USB1.3
USB_D-: IC_Navigator.56 Mini-USB1.2
USD_/CS: IC_Navigator.77
VBUS: IC_Navigator.54 R23.2
VCC: 
VUSB: BB.4 C13.2 C15.2 C16.2 C17.1 C18.1 C22.1 C26.1 C27.1 C28.2 C29.2 C31.1 C32.2 C33.2 C35.1 C37.2 C38.1 C39.1 C40.1 C41.1 C42.1 C43.1 C58.1 C59.1 C62.1 C63.1 C64.1 C67.1 C68.1 C71.1 C72.1 C74.1 C75.1 ConSwitchPad1.1 ConSwitchPad1.2 ConSwitchPad1.3 ConSwitchPad1.4 FPGARAM1.6 FPGARAM1.7 IC_FPGA_A1.5 IC_FPGA_A1.23 IC_FPGA_A1.29 IC_FPGA_A1.46 IC_FPGA_A1.54 IC_FPGA_A1.66 IC_FPGA_A1.116 IC_FPGA_A1.127 IC_FPGA_A1.138 IC_Navigator.37 IC_Navigator.55 JEPC.4 Module2.6 Module2.7 Motor_1.2 Motor_2.2 Motor_3.2 Motor_4.2 MSwitch1.1 MSwitch2.1 MSwitch3.1 P1.8 P2.2 R3.2 R4.1 R15.1 R16.1 R17.2 R18.2 R19.2 R24.2 R25.2 R27.2 R39.2 R40.2 R41.2 R42.2 R43.2
XBEE_/DTR: IC_Navigator.92
XBEE_/RESET: IC_Navigator.28
XBEE_ASSOCIATE: IC_Navigator.91
pads on no net: BB.6 BB.7 BB.8 D1.2 D2.2 D3.2 FPGARAM1.8 IC_FPGA_A1.18 IC_FPGA_A1.22 IC_FPGA_A1.76 IC_FPGA_A1.88 IC_FPGA_A1.89 IC_FPGA_A1.90 IC_Navigator.1 IC_Navigator.6 IC_Navigator.7 IC_Navigator.8 IC_Navigator.14 IC_Navigator.20 IC_Navigator.21 IC_Navigator.22 IC_Navigator.26 IC_Navigator.27 IC_Navigator.32 IC_Navigator.33 IC_Navigator.34 IC_Navigator.35 IC_Navigator.41 IC_Navigator.42 IC_Navigator.43 IC_Navigator.44 IC_Navigator.51 IC_Navigator.68 IC_Navigator.69 IC_Navigator.71 IC_Navigator.79 IC_Navigator.80 IC_Navigator.82 IC_Navigator.83 IC_Navigator.84 IC_Navigator.89 IC_Navigator.90 IC_Navigator.95 IC_Navigator.96 IC_Navigator.97 Mini-USB1.MH1 Mini-USB1.MH2 Module2.8 Module8.4 P1.12 P1.18 P1.20 P1.22 P1.24 P2.6 P3.12 P3.18 P3.20 P3.22 P3.24 Sensor3.4 X1.2 X4.8

## Text inside footprints (layer, text, board x,y; h text height)
BB: Top Overlay "10" at 16600,3960 h50 r90; Top Overlay "9" at 16700,3960 h50 r90; Top Overlay "1" at 16700,3420 h50 r90; Top Overlay "2" at 16600,3400 h50 r90
JEPC: Top Overlay "10" at 16310,3960 h50 r90; Top Overlay "9" at 16410,3960 h50 r90; Top Overlay "1" at 16410,3420 h50 r90; Top Overlay "2" at 16310,3400 h50 r90
Mini-USB1: Mechanical 1 "PCB Edge" at 7917.02,8021.09 h9.84 r90
Module8: Top Overlay "1" at 7746.18,2855.16 h59.06 r90; Top Overlay "4" at 7746.18,3145.32 h59.06 r90
P1: Top Overlay "2" at 7110,4845 h50 r90; Top Overlay "1" at 7210,4865 h50 r90; Top Overlay "39" at 7210,6905 h50 r90; Top Overlay "40" at 7110,6905 h50 r90
P3: Top Overlay "2" at 13185,1075 h50 r90; Top Overlay "1" at 13285,1095 h50 r90; Top Overlay "39" at 13285,3135 h50 r90; Top Overlay "40" at 13185,3135 h50 r90
Sensor3: Top Overlay "1" at 7296.18,4300.16 h59.06 r90; Top Overlay "4" at 7296.18,4590.32 h59.06 r90